# Altium PCB ELC102 - Score Board.PcbDoc (part 2 of 4)
Units mil, origin at the board's own origin, x right, y up, seen from the top; angles counter-clockwise.
Board outline 15000 x 7000 mil, 4 copper layers (Top Layer, Ground, Power, Bottom Layer); 609 components, 525 nets, 1780 pads, 561 vias.
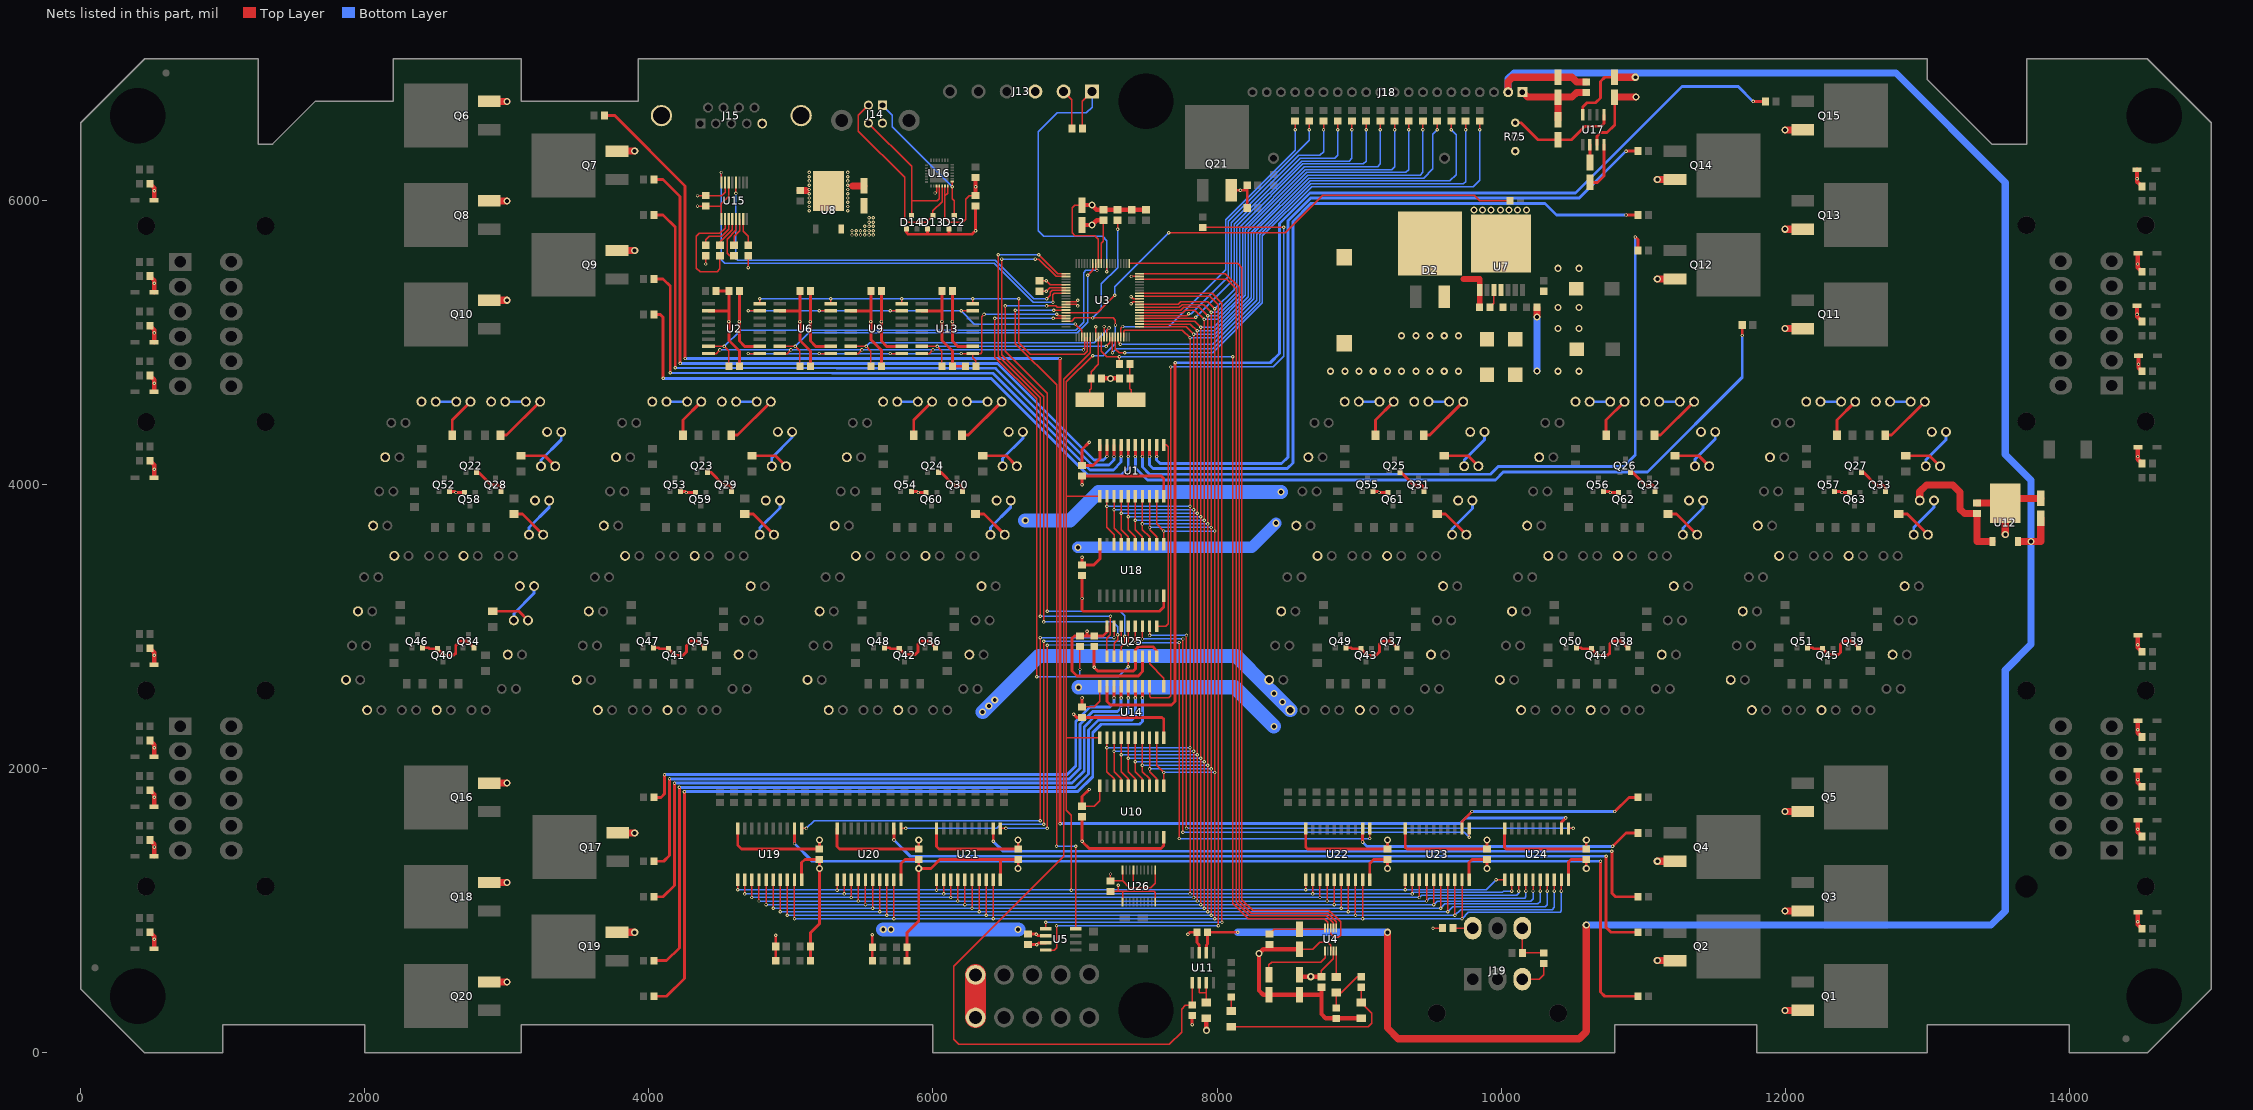
[diagram p4: the nets of this part, all layers, seen from the top]

## Via types
v1: diameter 24, hole 12, Top Layer to Bottom Layer, 468 vias
v2: diameter 50, hole 28, Top Layer to Bottom Layer, 93 vias

## Nets (pads, with @x,y where several pads share a name; then routed paths per layer and width w, separated by ;. In a path a pad name is that pad's centre, name@x,y a point inside that pad or via, vN(x,y) a via of type N, cw(c..) or ccw(c..) an arc to the next point about the centre after c; other vN are vias at no path point)
5V_DISABLE: R17.1 U3.35 | length 3522.8
  Top Layer w10: U3.35@6935.16,5211.42 7156.42,5211.42 v1(7280,5335) ; v1(7660,5775) 8480,5775 8745,6040 9810,6040 9850,6000 R17.1@10063,6000
  Bottom Layer w10: v1(7280,5335) 7280,5395 v1(7660,5775)
"+3.3 VDC": C1.1 C2.1 C3.1 C4.1 C6.1 C10.1 C14.1 C16.1 C18.1 C23.1 C25.1 C30.1 C33.1 C36.1 C37.1 C39.1 C46.1 C47.1 C48.1 C49.1 C50.1 C51.1 C52.1 C53.1 C54.1 J13.2 R1.1 R2.1 R3.2 R4.2 R16.2 R19.1 R31.2 R54.2 R55.1 R58.2 R60.2 R61.2 R68.2 R74.2 R82.2 R104.1 R231.1 R232.1 U1.20 U2.2 U3.12 U3.25 U3.32 U3.48 U3.71 U4.9 U5.3 U6.2 U8.3 U9.2 U10.20 U13.2 U14.20 U15.15 U16.6 U16.7 U18.20 U19.20 U20.20 U21.20 U22.20 U23.20 U24.20 U25.6 U25.16 U26.11 U26.17 U26.20 | length 14810
  Top Layer w10: v1(4342,6037) C36.1@4400,6037 4513,6037 4536.02,6060.02 U15.15@4536.02,6128.94 ; U16.6@6084.37,6104.45 6084.37,6035 ; U16.7@6104.06,6104.45 6104.06,6054.69 6084.37,6035 ; C39.1@6300,6037 6257,6037 6230,6010 6230,5870 6210,5850 6115,5850 6084.37,5880.63 6084.37,6035 ; C3.1@6750,5437 v1(6798,5437) 6826.73,5408.27 U3.25@6935.16,5408.27 ; J13.2@6920,6770 6978,6712 R3.2@6978,6510 ; U3.32@6935.16,5270.47 7009.53,5270.47 v1(7020,5260) ; C30.1@7050,1737 7137,1737 7175,1775 U10.20@7175,1881.1 ; C37.1@7050,2437 7137,2437 7175,2475 U14.20@7175,2581.1 ; C2.1@7050,5970 7000,5970 6980,5950 6980,5775 7000,5755 7140,5755 7165.47,5729.53 U3.12@7165.47,5559.84 ; U3.48@7145.79,5040.16 v1(7145.79,5114.21) ; v1(7250,1260) C54.1@7250,1212 7334.69,1212 ; U26.20@7334.84,1287.2 7334.84,1212.16 7334.69,1212 ; v1(7395,5325) 7410.16,5309.84 U3.71@7454.84,5309.84 ; U26.17@7411.61,1287.2 7411.61,1165 ; U26.11@7565.16,1287.2 7565.16,1195.16 7535,1165 7411.61,1165 ; C16.1@8735,537 8735,580 8819.68,664.68 U4.9@8819.68,719.29 ; v1(9521,879) R232.1@9588,879 ; 7334.69,1212 7381.69,1165 7411.61,1165
  Top Layer w20: U2.2@4419.88,5225 4563,5225 ; R2.1@4472,5365 C6.1@4563,5365 4563,5225 ; U19.20@4625,1581.1 4625,1465 4653,1437 C47.1@5200,1437 v2(5200,1500) ; R4.2@4637,4835 4637,4943 4563,5017 v1(4563,5150) 4563,5225 ; R60.2@4893,650 R61.2@4893,750 v1(4893,828) ; U6.2@4919.88,5225 5063,5225 ; C14.1@5063,5365 5063,5225 ; R16.2@5137,4835 5137,4943 5063,5017 v1(5063,5150) 5063,5225 ; U20.20@5325,1581.1 5325,1454 5342,1437 C48.1@5900,1437 v2(5900,1500) ; U9.2@5419.88,5225 5563,5225 ; C25.1@5563,5365 5563,5225 ; R68.2@5573,650 R74.2@5573,745 v1(5573,832) ; R31.2@5637,4835 5637,4948 5563,5022 v1(5563,5150) 5563,5225 ; U13.2@5919.88,5225 6063,5225 ; U21.20@6025,1581.1 6025,1455 6043,1437 C49.1@6600,1437 v2(6600,1500) ; C33.1@6063,5365 6063,5225 ; R1.1@6228,4835 R58.2@6137,4835 6137,4943 6063,5017 v1(6063,5150) 6063,5225 ; C10.1@6670,763 v1(6730,763) 6742,775 U5.3@6794.69,775 ; C30.1@7050,1737 7050,1805 v1(7100,1855) ; C37.1@7050,2437 v1(7050,2500) ; v1(7050,3490) C46.1@7050,3437 7132,3437 7175,3480 U18.20@7175,3581.1 ; v1(7085,2970) 7085,2937 ; v1(7100,4300) 7050,4250 C4.1@7050,4137 7127,4137 7175,4185 U1.20@7175,4281.1 ; U25.16@7225,3005.31 7225,2964 7198,2937 C53.1@7135,2937 7085,2937 ; U25.6@7475,2794.68 7475,2685 7445,2655 7015,2655 6980,2690 6980,2920 6997,2937 R231.1@7035,2937 7085,2937 ; v1(7825,200) R54.2@7825,263 ; U22.20@8625,1581.1 8625,1450 8638,1437 C50.1@9200,1437 v2(9200,1500) ; U23.20@9325,1581.1 9325,1449 9337,1437 C51.1@9900,1437 v2(9900,1500) ; U24.20@10025,1581.1 10025,1449 10037,1437 C52.1@10600,1437 v2(10600,1500)
  Top Layer w30: C39.1@6300,6037 v1(6300,6100) R82.2@6300,6163 ; C2.1@7050,5970 v2(7119,5970) 7152,5937 C1.1@7200,5937 R19.1@7300,5937 R55.1@7400,5937 R104.1@7500,5937 ; C18.1@8583,537 v2(8660,537) C16.1@8735,537
  other v1: 5430,5760 5460,5760 5490,5760 5520,5760 5550,5760 5580,5760 5430,5790 5460,5790 5490,5790 5520,5790 5550,5790 5580,5790 5520,5820 5550,5820 5580,5820 5550,5850 5580,5850 5550,5880 5580,5880
"+5 VDC": C29.1 C32.1 C42.1 C43.1 C45.1 J18.2 U11.6 U12.3 U17.8 | length 18073.4
  Top Layer w20: U11.6@7925,705.32 7925,760 7932,767 C29.1@7932,850 v1(8145,850) ; U17.8@10575,6605.31 10575,6660 10605,6690 10665,6690 10700,6725 10700,6840 10730,6870 C45.1@10800,6870
  Top Layer w50: v2(9200,850) 9200,175 9275,100 10550,100 10600,150 v2(10600,900) ; J18.2@10050,6765 10050,6840 10080,6870 C42.1@10400,6870 10500,6870 10533,6837 C43.1@10600,6837 ; C45.1@10800,6870 v2(10945,6870) ; U12.3@13645,3600.16 v2@13730,3600.16 ; v2(13730,3600) v2@13730,3600.16 ; 13799.84,3600.16 v2@13730,3600.16 ; 13800,3600.16 C32.1@13800,3765
  Bottom Layer w50: v1(8145,850) v2(9200,850) ; J18.2@10050,6765 10050,6860 10090,6900 10945,6900 ; v2(10600,900) 13450,900 13550,1000 13550,2695 13730,2875 v2(13730,3600) 13730,4035 13550,4215 13550,6130 12780,6900 10945,6900 ; v2(10945,6870) 10945,6900
"+8 VDC": C20.1 C24.1 C28.1 DS1.1 DS3.1 DS5.1 DS7.1 DS9.1 DS11.1 DS13.1 DS15.1 DS17.1 DS19.1 DS21.1 DS23.1 DS25.1 DS27.1 DS29.1 DS31.1 DS33.1 DS35.1 DS37.1 DS39.1 DS41.1 DS43.1 DS45.1 DS47.1 DS49.1 DS51.1 DS53.1 DS55.1 DS57.1 DS59.1 DS61.1 DS63.1 DS65.1 DS67.1 DS69.1 DS71.1 DS73.1 DS75.1 DS77.1 DS79.1 DS81.1 DS83.1 DS85.1 DS87.1 DS89.1 DS91.1 DS93.1 DS95.1 DS97.1 DS99.1 DS101.1 DS103.1 DS105.1 DS107.1 DS109.1 DS111.1 DS113.1 DS115.1 DS117.1 DS119.1 DS121.1 DS123.1 DS125.1 DS127.1 DS129.1 DS131.1 DS133.1 DS135.1 DS137.1 DS139.1 DS141.1 DS143.1 DS145.1 DS147.1 DS149.1 DS151.1 DS153.1 DS155.1 DS157.1 DS159.1 DS161.1 DS163.1 DS165.1 DS167.1 L1.2 R29.2 U12.1 | length 5754.3
  Top Layer w50: v2(10252,5182) R29.2@10252,5250 ; DS47.1@12947.9,3890.3 12947.9,3952.9 12995,4000 13180,4000 13230,3950 13230,3830 13262,3798 C28.1@13350,3798 13350,3605.16 ; 13350,3600.16 U12.1@13455,3600.16
  Bottom Layer w50: v2(10252,4802) v2(10252,5182)
  Bottom Layer w100: v2(6350,2400) v2(6392.96,2442.96) v2(6435,2485) 6745,2795 8135.3,2795 8335.1,2595.2 v2(8399.99,2530.31) 8460.15,2470.15 DS91.1@8516.1,2414.2 ; v2(6650,3750) 6965,3750 7165,3950 v2(8450,3950)
  other v2: 8460,2470 8800,4800 8900,4800 9000,4800 9100,4800 9200,4800 9300,4800 9400,4800 9500,4800 9600,4800 9700,4800
AUDIO_SHUTDOWN: R54.1 U3.46 U11.1 | length 7406.4
  Top Layer w10: U3.46@7106.42,5040.16 7106.42,4931.42 6920,4745 6920,1385 6145,610 6145,95 6180,60 7665,60 7750,145 7750,309 7778,337 R54.1@7825,337 U11.1@7825,494.68
CAN_H\S\/STBY: U3.34 U5.8 | length 4965.7
  Top Layer w10: v1(6580,5230) 6580,4995 6870,4705 v1(6870,1455) ; v1(6850,5230) 6851.1,5231.1 U3.34@6935.16,5231.1 ; v1(7005,1455) U5.8@7005.31,875
  Bottom Layer w10: v1(6580,5230) v1(6850,5230) ; v1(6870,1455) v1(7005,1455)
CANRX: U3.73 U5.1 | length 6254.2
  Top Layer w10: U5.1@6795,875.32 v1(6795,920) ; U3.73@7454.84,5349.21 7455.63,5350 7965,5350 8035,5280 v1(8035,920)
  Bottom Layer w10: v1(6795,920) v1(8035,920)
CANTX: U3.72 U5.4 | length 6331.3
  Top Layer w10: U5.4@6794.69,725 6855,725 6870,740 v1(6870,895) ; U3.72@7454.84,5329.53 7950.47,5329.53 8010,5270 v1(8010,895)
  Bottom Layer w10: v1(6870,895) v1(8010,895)
CLK0: U19.11 U25.15 | length 3592.6
  Top Layer w10: U19.11@5075,1581.1 v1(5108.9,1581.1) ; v1(6755,1635) v1(6755,2925) ; v1(7275,2925) U25.15@7275,3005.31
  Bottom Layer w10: v1(5108.9,1581.1) 5162.79,1635 v1(6755,1635) ; v1(6755,2925) v1(7275,2925)
CLK1: U20.11 U25.14 | length 2957.3
  Top Layer w10: U20.11@5775,1581.1 v1(5808.9,1581.1) ; v1(6780,1610) v1(6780,2900) ; v1(7325,2900) U25.14@7325,3005.31
  Bottom Layer w10: v1(5808.9,1581.1) 6448.9,1581.1 6477.79,1610 v1(6780,1610) ; v1(6780,2900) v1(7325,2900)
CLK2: U21.11 U25.13 | length 2319.2
  Top Layer w10: U21.11@6475,1581.1 v1(6513.9,1581.1) ; v1(6805,1581.1) v1(6805,2870) ; v1(7375,2875) U25.13@7375,3005.31
  Bottom Layer w10: v1(6513.9,1581.1) v1(6805,1581.1) ; v1(6805,2870) v1(7375,2875)
CLK3: U22.11 U25.12 | length 3216.4
  Top Layer w10: v1(7425,2890) U25.12@7425,3005.31 ; v1(7735,1510) v1(7735,2890) ; v1(9075,1510) U22.11@9075,1581.1
  Bottom Layer w10: v1(7425,2890) v1(7735,2890) ; v1(7735,1510) v1(9075,1510)
CLK4: U23.11 U25.11 | length 3825.9
  Top Layer w10: v1(7475,2915) U25.11@7475,3005.31 ; v1(7760,1555) v1(7760,2915) ; v1(9775,1520) U23.11@9775,1581.1
  Bottom Layer w10: v1(7475,2915) v1(7760,2915) ; v1(7760,1555) 9740,1555 v1(9775,1520)
CLK5: U24.11 U25.10 | length 4442
  Top Layer w10: v1(7525,2940) U25.10@7525,3005.31 ; v1(7785,1581.1) v1(7785,2940) ; U24.11@10475,1581.1 v1(10508.9,1581.1)
  Bottom Layer w10: v1(7525,2940) v1(7785,2940) ; v1(7785,1581.1) v1(10508.9,1581.1)
CLK6: U1.11 U25.9 | length 1370.3
  Top Layer w10: U25.9@7575,3005.31 7639.68,3005.31 7655,3020.63 7655,4270 7643.9,4281.1 U1.11@7625,4281.1
CLK7: U14.11 U25.7 | length 255
  Top Layer w10: U25.7@7525,2794.68 7525,2740 7625,2640 U14.11@7625,2581.1
COFS: U3.1 U4.3 | length 6235.4
  Top Layer w10: U3.1@7382.01,5559.84 8145.16,5559.84 8175,5530 8175,1080 8250.62,1004.38 8788.12,1004.38 8870,922.5 8870,830 8855,815 8825,815 8800,840 U4.3@8800,880.71
CSCK: U3.78 U4.2 | length 5807.4
  Top Layer w10: U3.78@7454.84,5447.64 8067.36,5447.64 8135,5380 8135,1060 8230,965 8770,965 8819.68,915.32 U4.2@8819.68,880.71
CSDO: U3.80 U4.1 | length 5849.4
  Top Layer w10: U3.80@7454.84,5487.01 8057.99,5487.01 8155,5390 8155,1070 8240.62,984.38 8780.62,984.38 8839.37,925.63 U4.1@8839.37,880.71
D0: R20.1 U1.2 U3.58 U10.18 U14.2 U18.18 U19.2 U20.2 U21.2 U22.2 U23.2 U24.2 | length 15150.8
  Top Layer w10: v1(4675,1120) U19.2@4675,1218.9 ; v1(5375,1120) U20.2@5375,1218.9 ; v1(6075,1120) U21.2@6075,1218.9 ; U14.2@7225,2218.9 v1(7225,2150) 7225,1980 7275,1930 U10.18@7275,1881.1 ; U1.2@7225,3918.9 v1(7225,3850) 7225,3700 7275,3650 U18.18@7275,3581.1 ; U3.58@7342.64,5040.16 7342.64,5082.64 7350,5090 7755,5090 v1(7810,5035) v1(7810,3850) v1(7810,2150) v1(7810,1120) ; v1(8675,1120) U22.2@8675,1218.9 ; v1(9375,1120) U23.2@9375,1218.9 ; v1(9550,6500) R20.1@9550,6563 ; v1(10075,1140) U24.2@10075,1218.9 U24.2@10075,1225
  Bottom Layer w10: v1(4675,1120) v1(5375,1120) v1(6075,1120) v1(7810,1120) v1(8675,1120) v1(9375,1120) 9385,1130 10010,1130 10020,1140 v1(10075,1140) ; v1(7225,2150) v1(7810,2150) ; v1(7225,3850) v1(7810,3850) ; v1(7810,5035) 7985,5035 8260,5310 8260,5774.38 8645.62,6160 9455,6160 9520,6225 9520,6470 v1(9550,6500)
D1: R21.1 U1.3 U3.61 U10.17 U14.3 U18.17 U19.3 U20.3 U21.3 U22.3 U23.3 U24.3 | length 15051.1
  Top Layer w10: v1(4725,1095) U19.3@4725,1218.9 ; v1(5425,1095) U20.3@5425,1218.9 ; v1(6125,1095) U21.3@6125,1218.9 ; U14.3@7275,2218.9 v1(7275,2125) 7275,1980 7325,1930 U10.17@7325,1881.1 ; U1.3@7275,3918.9 v1(7275,3825) 7275,3695 7325,3645 U18.17@7325,3581.1 ; U3.61@7454.84,5112.99 7782.01,5112.99 v1(7835,5060) v1(7835,3825) v1(7835,2125) v1(7835,1095) ; v1(8725,1095) U22.3@8725,1218.9 ; v1(9425,1095) U23.3@9425,1218.9 ; v1(9450,6500) R21.1@9450,6563 ; v1(10125,1140) U24.3@10125,1218.9
  Bottom Layer w10: v1(4725,1095) v1(5425,1095) v1(6125,1095) v1(7835,1095) v1(8725,1095) v1(9425,1095) 9440,1110 10110,1110 10125,1125 v1(10125,1140) ; v1(7275,2125) v1(7835,2125) ; v1(7275,3825) v1(7835,3825) ; v1(7835,5060) 7982.66,5060 8240,5317.34 8240,5779.92 8640.08,6180 9430,6180 9450,6200 v1(9450,6500)
D2: R22.1 U1.4 U3.62 U10.16 U14.4 U18.16 U19.4 U20.4 U21.4 U22.4 U23.4 U24.4 | length 15077.9
  Top Layer w10: v1(4775,1070) U19.4@4775,1218.9 ; v1(5475,1070) U20.4@5475,1218.9 ; v1(6175,1070) U21.4@6175,1218.9 ; U14.4@7325,2218.9 v1(7325,2100) 7325,1980 7375,1930 U10.16@7375,1881.1 ; U1.4@7325,3918.9 v1(7325,3800) 7325,3685 7375,3635 U18.16@7375,3581.1 ; U3.62@7454.84,5132.68 7812.32,5132.68 v1(7860,5085) v1(7860,3800) v1(7860,2100) v1(7860,1070) ; v1(8775,1070) U22.4@8775,1218.9 ; v1(9350,6500) R22.1@9350,6563 ; v1(9475,1070) U23.4@9475,1218.9 ; v1(10175,1140) U24.4@10175,1218.9
  Bottom Layer w10: v1(4775,1070) v1(5475,1070) v1(6175,1070) v1(7860,1070) v1(8775,1070) v1(9475,1070) 9495,1090 10165,1090 10175,1100 v1(10175,1140) ; v1(7325,2100) v1(7860,2100) ; v1(7325,3800) v1(7860,3800) ; v1(7860,5085) 7980,5085 8220,5325 8220,5789.38 8630.62,6200 9330,6200 9350,6220 v1(9350,6500)
D3: R23.1 U1.5 U3.63 U10.15 U14.5 U18.15 U19.5 U20.5 U21.5 U22.5 U23.5 U24.5 | length 15099
  Top Layer w10: v1(4825,1045) U19.5@4825,1218.9 ; v1(5525,1045) U20.5@5525,1218.9 ; v1(6225,1045) U21.5@6225,1218.9 U21.5@6225,1220 ; U14.5@7375,2218.9 v1(7375,2075) 7375,1980 7425,1930 U10.15@7425,1881.1 ; U1.5@7375,3918.9 v1(7375,3775) 7375,3685 7425,3635 U18.15@7425,3581.1 ; U3.63@7454.84,5152.36 7842.64,5152.36 v1(7885,5110) v1(7885,3775) v1(7885,2075) v1(7885,1045) ; v1(8825,1045) U22.5@8825,1218.9 ; v1(9250,6500) R23.1@9250,6563 ; v1(9525,1045) U23.5@9525,1218.9 ; v1(10225,1140) U24.5@10225,1218.9
  Bottom Layer w10: v1(4825,1045) v1(5525,1045) v1(6225,1045) v1(7885,1045) v1(8825,1045) v1(9525,1045) 9550,1070 10210,1070 10225,1085 v1(10225,1140) ; v1(7375,2075) v1(7885,2075) ; v1(7375,3775) v1(7885,3775) ; v1(7885,5110) 7976.56,5110 8200,5333.44 8200,5798 8622,6220 9230,6220 9250,6240 v1(9250,6500)
D4: R24.1 U1.6 U3.66 U10.14 U14.6 U18.14 U19.6 U20.6 U21.6 U22.6 U23.6 U24.6 | length 15152.8
  Top Layer w10: v1(4875,1020) U19.6@4875,1218.9 ; v1(5575,1020) U20.6@5575,1218.9 ; v1(6275,1020) U21.6@6275,1218.9 ; U14.6@7425,2218.9 v1(7425,2050) 7425,1980 7475,1930 U10.14@7475,1881.1 ; U1.6@7425,3918.9 v1(7425,3750) 7425,3685 7475,3635 U18.14@7475,3581.1 ; U3.66@7454.84,5211.42 7758.58,5211.42 7777.17,5230 7845,5230 v1(7910,5165) v1(7910,3750) v1(7910,2050) v1@7910,1025 ; v1(8875,1020) U22.6@8875,1218.9 ; v1(9150,6500) R24.1@9150,6563 ; v1(9575,1020) U23.6@9575,1218.9 ; v1(10275,1140) U24.6@10275,1218.9
  Bottom Layer w10: v1(4875,1020) v1(5575,1020) v1(6275,1020) v1(7910,1020) v1(8875,1020) v1(9575,1020) 9605,1050 10260,1050 10275,1065 v1(10275,1140) ; v1(7425,2050) v1(7910,2050) ; v1(7425,3750) v1(7910,3750) ; v1(7910,5165) 8005,5165 8180,5340 8180,5805 8615,6240 9130,6240 9150,6260 v1(9150,6500)
D5: R25.1 U1.7 U3.67 U10.13 U14.7 U18.13 U19.7 U20.7 U21.7 U22.7 U23.7 U24.7 | length 15180.8
  Top Layer w10: v1(4925,995) U19.7@4925,1218.9 ; v1(5625,995) U20.7@5625,1218.9 ; v1(6325,995) U21.7@6325,1218.9 ; U3.67@7454.84,5231.1 7746.1,5231.1 7765,5250 7875,5250 v1(7935,5190) v1(7935,3725) v1(7935,2025) v1(7935,995) ; U14.7@7475,2218.9 v1(7475,2025) 7475,1980 7525,1930 U10.13@7525,1881.1 ; U1.7@7475,3918.9 v1(7475,3725) 7475,3685 7525,3635 U18.13@7525,3581.1 ; v1(8925,995) U22.7@8925,1218.9 ; v1(9050,6500) R25.1@9050,6563 ; v1(9625,995) U23.7@9625,1218.9 ; v1(10325,1140) U24.7@10325,1218.9
  Bottom Layer w10: v1(4925,995) v1(5625,995) v1(6325,995) v1(7935,995) v1(8925,995) v1(9625,995) 9660,1030 10310,1030 10325,1045 v1(10325,1140) ; v1(7475,2025) v1(7935,2025) ; v1(7475,3725) v1(7935,3725) ; v1(7935,5190) 8000,5190 8160,5350 8160,5815 8605,6260 9030,6260 9050,6280 v1(9050,6500)
D6: R26.1 U1.8 U3.68 U10.12 U14.8 U18.12 U19.8 U20.8 U21.8 U22.8 U23.8 U24.8 | length 15205.7
  Top Layer w10: v1(4975,970) U19.8@4975,1218.9 ; v1(5675,970) U20.8@5675,1218.9 ; v1(6375,970) U21.8@6375,1218.9 ; U3.68@7454.84,5250.79 7735.79,5250.79 7755,5270 7905,5270 v1(7960,5215) v1(7960,3700) v1(7960,2000) v1(7960,970) ; U14.8@7525,2218.9 v1(7525,2000) 7525,1980 7575,1930 U10.12@7575,1881.1 ; U1.8@7525,3918.9 v1(7525,3700) 7525,3685 7575,3635 U18.12@7575,3581.1 ; v1(8950,6500) R26.1@8950,6563 ; v1(8975,970) U22.8@8975,1218.9 ; v1(9675,970) U23.8@9675,1218.9 ; v1(10375,1140) U24.8@10375,1218.9
  Bottom Layer w10: v1(4975,970) v1(5675,970) v1(6375,970) v1(7960,970) v1(8975,970) v1(9675,970) 9715,1010 10360,1010 10375,1025 v1(10375,1140) ; v1(7525,2000) v1(7960,2000) ; v1(7525,3700) v1(7960,3700) ; v1(7960,5215) 7998.12,5215 8140,5356.88 8140,5824.92 8595.08,6280 8930,6280 8950,6300 v1(8950,6500)
D7: R27.1 U1.9 U3.69 U10.11 U14.9 U18.11 U19.9 U20.9 U21.9 U22.9 U23.9 U24.9 | length 15126.9
  Top Layer w10: v1(5025,945) U19.9@5025,1218.9 ; v1(5725,945) U20.9@5725,1218.9 ; v1(6425,945) U21.9@6425,1218.9 ; U3.69@7454.84,5270.47 7725.47,5270.47 7745,5290 7935,5290 v1(7985,5240) v1(7985,3675) v1(7985,1975) v1(7985,945) ; U14.9@7575,2218.9 7575,2025 v1(7625,1975) U10.11@7625,1881.1 ; U1.9@7575,3918.9 7575,3725 v1(7625,3675) U18.11@7625,3581.1 ; v1(8850,6500) R27.1@8850,6563 ; v1(9025,945) U22.9@9025,1218.9 ; v1(9725,945) U23.9@9725,1218.9 ; v1(10425,1140) U24.9@10425,1218.9
  Bottom Layer w10: v1(5025,945) v1(5725,945) v1(6425,945) v1(7985,945) v1(9025,945) v1(9725,945) 9770,990 10415,990 10425,1000 v1(10425,1140) ; v1(7625,1975) v1(7985,1975) ; v1(7625,3675) v1(7985,3675) ; v1(7985,5240) 8120,5375 8120,5835 8585,6300 8830,6300 8850,6320 v1(8850,6500)
F\O\R\C\E\O\F\F\: U3.28 U15.16 | length 3293.3
  Top Layer w10: U15.16@4510.43,6128.94 v1(4510.43,6199.57) ; v1(6845,5285) 6845,5340 6854.21,5349.21 U3.28@6935.16,5349.21
  Bottom Layer w10: v1(4510.43,6199.57) 4510.43,5584.57 4535,5560 6432.81,5560 6707.81,5285 v1(6845,5285)
FORCEON: U3.27 U15.12 | length 3012.1
  Top Layer w10: v1(4612.79,6052.21) U15.12@4612.79,6128.94 ; v1(6800,5310) 6825,5335 6825,5355 6838.9,5368.9 U3.27@6935.16,5368.9
  Bottom Layer w10: v1(4612.79,6052.21) 4612.79,5592.21 4625,5580 6440,5580 6710,5310 v1(6800,5310)
GND: C1.2 C2.2 C3.2 C4.2 C5.2 C6.2 C7.2 C8.2 C9.2 C10.2 C11.2 C12.2 C14.2 C16.2 C17.2 C18.2 C19.2 C20.2 C22.2 C23.2 C24.2 C25.2 C26.2 C27.2 C28.2 C29.2 C30.2 C31.2 C32.2 C33.2 C36.2 C37.2 C38.2 C39.2 C40.2 C41.1 C42.2 C43.2 C45.2 C46.2 C47.2 C48.2 C49.2 C50.2 C51.2 C52.2 C53.2 C54.2 D2.3 D3.1 D4.1 D5.1 D6.1 D7.1 D8.1 D9.1 D10.1 D11.1 D12.1 D13.1 D14.1 D15.1 D16.1 D17.1 D18.1 D19.1 D20.1 D21.1 D22.1 D23.1 D24.1 D25.1 J1.1 J5.1 J13.3 J14.4 J15.5 J15.10 J15.11 J18.1 J19.3 JP1.2 JP2.2 JP3.2 JP4.2 Q1.3 Q2.3 Q3.3 Q4.3 Q5.3 Q6.3 Q7.3 Q8.3 Q9.3 Q10.3 Q11.3 Q12.3 Q13.3 Q14.3 Q15.3 Q16.3 Q17.3 Q18.3 Q19.3 Q20.3 Q21.3 Q22.2 Q23.2 Q24.2 Q25.2 Q26.2 Q27.2 Q28.2 Q29.2 Q30.2 Q31.2 Q32.2 Q33.2 Q34.2 Q35.2 Q36.2 Q37.2 Q38.2 Q39.2 Q40.2 Q41.2 Q42.2 Q43.2 Q44.2 Q45.2 Q46.2 Q47.2 Q48.2 Q49.2 Q50.2 Q51.2 Q52.2 Q53.2 Q54.2 Q55.2 Q56.2 Q57.2 Q58.2 Q59.2 Q60.2 Q61.2 Q62.2 Q63.2 R18.1 R28.1 R34.2 R36.2 R38.2 R40.2 R42.2 R44.2 R46.2 R48.2 R50.2 R52.2 R57.1 R75.1 R85.2 R87.2 R89.2 R91.2 R93.2 R95.2 R97.2 R99.2 R101.2 R103.2 R234.1 U1.10 U2.10 U3.11 U3.26 U3.31 U3.51 U3.70 U3.79 U4.8 U5.2 U6.10 U7.4 U7.8 U8.2 U9.10 U10.10 U11.7 U12.2 U13.10 U14.10 U15.1 U15.14 U16.3 U17.3 U18.10 U19.10 U20.10 U21.10 U22.10 U23.10 U24.10 U25.5 U25.8 U26.1 U26.10 | length 31836.3
  Top Layer w10: v1(4342,5963) C36.2@4400,5963 4507.43,5963 ; v1(4400,5555) C38.2@4400,5613 ; U15.1@4510.43,5871.06 4510.43,5980.43 4561.61,6031.61 U15.14@4561.61,6128.94 ; v1(4700,5530) C40.2@4700,5613 ; v1(6015,6055) 6025.31,6065.31 U16.3@6025.31,6104.45 ; C3.2@6750,5363 v1(6798,5363) 6823.58,5388.58 U3.26@6935.16,5388.58 ; U3.31@6935.16,5290.16 7010.16,5290.16 v1(7020,5300) ; U3.11@7185.16,5559.84 7185.16,5700.16 7200,5715 C1.2@7200,5863 ; U3.51@7204.84,5040.16 v1(7204.84,5114.84) ; C54.2@7250,1138 7305,1138 ; v1(7305,1180) 7305,1138 ; U26.1@7334.84,1062.8 7334.84,1137.84 ; v1(7395,5275) 7410.16,5290.16 U3.70@7454.84,5290.16 ; v1(7397.32,5467.32) U3.79@7454.84,5467.32 ; U26.10@7565.16,1062.8 7565.16,1129.84 7557,1138 7305,1138 ; C7.2@8580,730 8675,730 8725,780 8780,780 8800,760 U4.8@8800,719.29 ; J19.3@10145,520 J19.3@10150,520 10270,520 10300,550 R234.1@10300,631
  Top Layer w20: Q46.2@2407.4,2853.74 2448.74,2853.74 2456.22,2846.26 Q40.2@2512.6,2846.26 v1(2558.86,2800) 2625,2800 2640,2815 2640,2870 2670,2900 2721.14,2900 Q34.2@2767.4,2853.74 ; Q52.2@2597.4,3953.74 2633.74,3953.74 v1(2641.22,3946.26) Q58.2@2702.6,3946.26 ; Q22.2@2787.4,4088.74 2801.26,4088.74 v1(2890,4000) 2940,4000 2957.4,3982.6 Q28.2@2957.4,3953.74 ; Q47.2@4032.4,2853.74 4068.74,2853.74 4076.22,2846.26 Q41.2@4137.6,2846.26 v1(4183.86,2800) 4240,2800 4265,2825 4265,2870 4295,2900 4346.14,2900 Q35.2@4392.4,2853.74 ; Q53.2@4222.4,3953.74 4256.26,3953.74 v1(4263.74,3946.26) Q59.2@4327.6,3946.26 ; Q23.2@4412.4,4088.74 4436.26,4088.74 v1(4525,4000) 4565,4000 4582.4,3982.6 Q29.2@4582.4,3953.74 ; C6.2@4637,5365 v1(4637,5150) 4637,5013 4675,4975 U2.10@4780.12,4975 ; U19.10@5075,1218.9 5075,1340 5098,1363 C47.2@5200,1363 v2(5200,1300) 5200,910 5137,847 JP2.2@5137,750 JP1.2@5137,650 ; C14.2@5137,5365 v1(5137,5150) 5137,5013 5175,4975 U6.10@5280.12,4975 ; C25.2@5637,5365 v1(5637,5150) 5637,5013 5675,4975 U9.10@5780.12,4975 ; Q48.2@5657.4,2853.74 5693.74,2853.74 5701.22,2846.26 Q42.2@5762.6,2846.26 v1(5803.86,2805) 5875,2805 5895,2825 5895,2880 5915,2900 5971.14,2900 Q36.2@6017.4,2853.74 ; U20.10@5775,1218.9 5775,1335 5803,1363 C48.2@5900,1363 v2(5900,1300) ; D14.1@5812.6,5803.74 5812.6,5777.6 5825.2,5765 6275,5765 v1(6300,5790) C39.2@6300,5963 ; JP3.2@5817,650 JP4.2@5817,745 5817,847 5900,930 v2(5900,1300) ; Q54.2@5847.4,3953.74 5888.74,3953.74 v1(5896.22,3946.26) Q60.2@5952.6,3946.26 ; 5962.6,5767.6 D13.1@5962.6,5803.74 ; Q24.2@6037.4,4088.74 6056.26,4088.74 v1(6145,4000) 6190,4000 6207.4,3982.6 Q30.2@6207.4,3953.74 ; 6112.6,5767.6 D12.1@6112.6,5803.74 ; C33.2@6137,5365 v1(6137,5150) 6137,5013 6175,4975 U13.10@6280.12,4975 ; U21.10@6475,1218.9 6475,1363 ; v2(6600,1300) C49.2@6600,1363 6475,1363 ; C10.2@6670,837 v1(6728,837) 6740,825 U5.2@6794.69,825 ; v1(6990,2385) 7012,2363 C37.2@7050,2363 7613,2363 7625,2351 U14.10@7625,2218.9 ; C30.2@7050,1663 v1(7050,1490) 7100,1440 7605,1440 7625,1460 U10.10@7625,1518.9 ; C46.2@7050,3363 v1(7050,3200) 7050,3120 7060,3110 7595,3110 7625,3140 U18.10@7625,3218.9 ; v1(7050,4000) C4.2@7050,4063 7607,4063 7625,4045 U1.10@7625,3918.9 ; C53.2@7135,2863 v1(7135,2715) 7160,2690 7410,2690 7425,2705 U25.5@7425,2794.68 7425,2840 7445,2860 7550,2860 7575,2835 U25.8@7575,2794.68 ; v1(7795,835) 7810,850 C29.2@7858,850 7858,777 7875,760 U11.7@7875,705.32 ; Q21.3@8100,6075 v1(8165,6075) 8213,6075 ; C31.2@8213,5950 8213,6075 ; R57.1@8213,6110 8213,6075 ; Q49.2@8907.4,2853.74 8943.74,2853.74 8951.22,2846.26 Q43.2@9012.6,2846.26 v1(9058.86,2800) 9120,2800 9145,2825 9145,2880 9165,2900 9221.14,2900 Q37.2@9267.4,2853.74 ; U22.10@9075,1218.9 9075,1335 9103,1363 C50.2@9200,1363 v2(9200,1300) ; Q55.2@9097.4,3953.74 9133.74,3953.74 v1(9141.22,3946.26) Q61.2@9202.6,3946.26 ; Q25.2@9287.4,4088.74 9296.26,4088.74 v1(9385,4000) 9440,4000 9457.4,3982.6 Q31.2@9457.4,3953.74 ; U23.10@9775,1218.9 9775,1341 9797,1363 C51.2@9900,1363 v2(9900,1300) ; U24.10@10475,1218.9 10475,1345 10493,1363 C52.2@10600,1363 v2(10600,1300) ; Q50.2@10532.4,2853.74 10563.74,2853.74 10571.22,2846.26 Q44.2@10637.6,2846.26 v1(10683.86,2800) 10750,2800 10765,2815 10765,2880 10785,2900 10846.14,2900 Q38.2@10892.4,2853.74 ; U17.3@10675,6394.69 10675,6455 10700,6480 10745,6480 10800,6535 C45.2@10800,6730 ; Q56.2@10722.4,3953.74 10761.26,3953.74 v1(10768.74,3946.26) Q62.2@10827.6,3946.26 ; Q26.2@10912.4,4088.74 10926.26,4088.74 v1(11015,4000) 11065,4000 11082.4,3982.6 Q32.2@11082.4,3953.74 ; Q51.2@12157.4,2853.74 12193.74,2853.74 12201.22,2846.26 Q45.2@12262.6,2846.26 v1(12303.86,2805) 12375,2805 12390,2820 12390,2880 12410,2900 12471.14,2900 Q39.2@12517.4,2853.74 ; Q57.2@12347.4,3953.74 12386.26,3953.74 12393.74,3946.26 v1(12400,3946.26) Q63.2@12452.6,3946.26 ; Q27.2@12537.4,4088.74 12551.26,4088.74 v1(12640,4000) 12690,4000 12707.4,3982.6 Q33.2@12707.4,3953.74 ; v2(5900,1300) 5985,1300 6048,1363 6475,1363
  Top Layer w30: R103.2@487,850 516.93,820.07 v1(516.93,800) D24.1@516.93,735 ; R101.2@487,1500 516.93,1470.07 v1(516.93,1450) D23.1@516.93,1385 ; R99.2@487,1850 516.93,1820.07 v1(516.93,1800) D22.1@516.93,1735 ; R97.2@487,2200 516.93,2170.07 v1(516.93,2150) D21.1@516.93,2085 ; R95.2@487,2850 516.93,2820.07 v1(516.93,2800) D20.1@516.93,2735 ; R52.2@487,4170 516.93,4140.07 v1(516.93,4110) D7.1@516.93,4050 ; R50.2@487,4770 516.93,4740.07 v1(516.93,4715) D6.1@516.93,4655 ; R48.2@487,5120 516.93,5090.07 v1(516.93,5070) D11.1@516.93,5005 ; R46.2@487,5470 516.93,5440.07 v1(516.93,5420) D10.1@516.93,5355 ; R44.2@487,6120 516.93,6090.07 v1(516.93,6070) D9.1@516.93,6005 ; C2.2@7050,5830 v2(7120,5830) 7153,5863 C1.2@7200,5863 ; C26.2@7187,4750 v2(7250,4750) C22.2@7313,4750 ; v2(7925,160) C27.2@7925,245 ; C7.2@8580,730 8370,730 8325,730 v2(8295,700) 8295,440 8325,410 C12.2@8365,410 C18.2@8580,410 8730,410 ; C16.2@8735,463 8735,275 8765,245 8840,245 C19.2@9015,245 ; D17.1@14478.07,5260 v1(14478.07,5200) 14478.07,5184.93 R89.2@14513,5150 ; D19.1@14478.07,6220 v1(14478.07,6155) 14478.07,6134.93 R93.2@14513,6100 ; D3.1@14483.07,990 v1(14483.07,925) 14483.07,904.93 R34.2@14513,875 ; D4.1@14483.07,1640 v1(14483.07,1575) 14483.07,1554.93 R36.2@14513,1525 ; D5.1@14483.07,1990 v1(14483.07,1925) 14483.07,1904.93 R38.2@14513,1875 ; D25.1@14483.07,2340 v1(14483.07,2275) 14483.07,2254.93 R40.2@14513,2225 ; D8.1@14483.07,2940 v1(14483.07,2875) 14483.07,2854.93 R42.2@14513,2825 ; D15.1@14483.07,4265 v1(14483.07,4200) 14483.07,4179.93 R85.2@14513,4150 ; D18.1@14483.07,5630 v1(14483.07,5555) 14483.07,5529.93 R91.2@14513,5500 ; D16.1@14488.07,4910 v1(14488.07,4850) 14488.07,4824.93 R87.2@14513,4800
  Top Layer w50: Q20.3@2875,500 v2(3000,500) ; Q18.3@2875,1200 v2(3000,1200) ; Q16.3@2875,1900 v2(3000,1900) ; Q10.3@2875,5300 v2(3000,5300) ; Q8.3@2875,6000 v2(3000,6000) ; Q6.3@2875,6700 v2(3000,6700) ; Q19.3@3775,850 v2@3895,850 ; Q9.3@3775,5650 v2(3900,5650) ; Q7.3@3775,6350 v2(3900,6350) ; Q17.3@3780,1550 v2(3900,1550) ; C17.2@5065,6072 5107,6072 ; 5435,6105 C23.2@5515,6105 ; J18.1@10150,6765 10185,6730 C42.2@10400,6730 ; C41.1@10400,6570 C42.2@10400,6730 ; C43.2@10600,6763 10533,6763 10500,6730 C42.2@10400,6730 ; C45.2@10800,6730 v2(10950,6730) ; v2(11100,650) Q2.3@11225,650 ; v2(11100,1350) Q4.3@11225,1350 ; v2(11100,5450) Q12.3@11225,5450 ; v2(11100,6150) Q14.3@11225,6150 ; v2(12000,300) Q1.3@12125,300 ; v2(12000,1000) Q3.3@12125,1000 ; v2(12000,1700) Q5.3@12125,1700 ; v2(12000,5100) Q11.3@12125,5100 ; v2(12000,5800) Q13.3@12125,5800 ; v2(12000,6500) Q15.3@12125,6500 ; C28.2@13350,3872 U12.2@13483,3872 ; v2(13550,3650) U12.2@13550,3869.84 ; U12.2@13610,3905 C32.2@13800,3905
  Top Layer w150: J1.1@6300,250 J5.1@6300,550
  Bottom Layer w80: v2(7020,3560) 8245,3560 v2(8415,3730)
  Bottom Layer w100: v2(5650,870) v2(5705,870) v2(6600,870) ; v2(7025,2575) 8125,2575 v2(8400,2300)
  other v1: 5130,5930 5400,5930 5130,5960 5400,5960 5130,5990 5400,5990 5130,6020 5400,6020 5130,6050 5400,6050 5130,6080 5400,6080 5130,6110 5400,6110 5130,6140 5400,6140 5130,6170 5400,6170 5130,6200 5400,6200
  other v2: 3900,850 10400,4800 10550,4800 9300,5050 9400,5050 9500,5050 9600,5050 9700,5050 10400,5100 10550,5100 10400,5250 10550,5250 10400,5525 10550,5525 9810,5935 9870,5935 9930,5935 9995,5935 10055,5935 10115,5935 10180,5935
LAMP0: R6.1 U19.12 | length 7028.3
  Top Layer w20: v1(5025,1475) U19.12@5025,1581.1 ; v1(10700,1350) 10700,430 10730,400 R6.1@10963,400
  Bottom Layer w20: v1(5025,1475) 5150,1350 v1(10700,1350)
LAMP1: R7.1 U20.12 | length 5881.2
  Top Layer w20: v1(5725,1500) U20.12@5725,1581.1 ; v1(10740,1385) 10740,885 10775,850 R7.1@10963,850
  Bottom Layer w20: v1(5725,1500) 5840,1385 v1(10740,1385)
LAMP2: R8.1 U21.12 | length 4963.5
  Top Layer w20: v1(6425,1490) U21.12@6425,1581.1 ; v1(10780,1420) 10780,1125 10805,1100 R8.1@10963,1100
  Bottom Layer w20: v1(6425,1490) 6495,1420 v1(10780,1420)
LAMP3: R9.1 U22.12 | length 2085.9
  Top Layer w20: v1(9025,1485) U22.12@9025,1581.1 ; v1(10785,1455) 10880,1550 R9.1@10963,1550
  Bottom Layer w20: v1(9025,1485) 9055,1455 v1(10785,1455)
LAMP4: R10.1 U23.12 | length 1357.3
  Top Layer w20: U23.12@9725,1581.1 9725,1630 v1(9795,1700) ; v1(10800,1700) 10900,1800 R10.1@10963,1800
  Bottom Layer w20: v1(9795,1700) v1(10800,1700)
LAMP5: R11.1 U24.12 | length 11565.9
  Top Layer w20: R11.1@3687,6600 3760,6600 4255,6105 v1(4255,4890) ; v1(6895,1615) v1(6895,4890) ; U24.12@10425,1581.1 10425,1625 v1(10455,1655)
  Bottom Layer w20: v1(4255,4890) v1(6895,4890) ; v1(6895,1615) 9710,1615 9750,1655 v1(10455,1655)
LAMP6: R12.1 U1.19 | length 4785.8
  Top Layer w20: R12.1@4037,6150 4100,6150 4220,6030 v1(4220,4855) ; v1(7225,4200) U1.19@7225,4281.1
  Bottom Layer w20: v1(4220,4855) 6455,4855 7135,4175 7200,4175 v1(7225,4200)
LAMP7: R13.1 U1.18 | length 4665.5
  Top Layer w20: R13.1@4037,5900 4100,5900 4185,5815 v1(4185,4825) ; v1(7275,4200) U1.18@7275,4281.1
  Bottom Layer w20: v1@4190,4825 6445,4820 ; 6440,4820 7120,4140 7240,4140 7275,4175 v1(7275,4200)
LAMP8: R14.1 U1.17 | length 4344.3
  Top Layer w20: R14.1@4037,5450 4100,5450 4150,5400 v1(4150,4790) ; v1(7325,4200) U1.17@7325,4281.1
  Bottom Layer w20: v1(4150,4790) 6425,4785 7105,4105 7270,4105 7325,4160 v1(7325,4200)
LAMP9: R15.1 U1.16 | length 4239.8
  Top Layer w20: R15.1@4037,5200 4080,5200 4100,5180 v1(4100,4750) ; v1(7375,4200) U1.16@7375,4281.1
  Bottom Layer w20: v1(4100,4750) 6410,4750 7090,4070 7325,4070 7375,4120 v1(7375,4200)
LAMP10: R62.1 U1.15 | length 5135.8
  Top Layer w20: v1(7425,4200) U1.15@7425,4281.1 ; v1(11698,5052) R62.1@11698,5125
  Bottom Layer w20: v1(7425,4200) 7425,4120 7510,4035 9960,4035 10015,4090 11030,4090 11698,4758 v1(11698,5052)
LAMP11: R63.1 U1.14 | length 5340.2
  Top Layer w20: v1(7475,4200) U1.14@7475,4281.1 ; v1(10945,5745) 10963,5727 R63.1@10963,5650
  Bottom Layer w20: v1(7475,4200) 7475,4125 7525,4075 9925,4075 9980,4130 10865,4130 10945,4210 v1(10945,5745)
LAMP12: R64.1 U1.13 | length 5390.9
  Top Layer w20: v1(7525,4200) U1.13@7525,4281.1 ; v1(10880,5900) R64.1@10963,5900
  Bottom Layer w20: v1(7525,4200) 7525,4140 7550,4115 8495,4115 8535,4155 8535,5855 8660,5980 10310,5980 10390,5900 v1(10880,5900)
LAMP13: R65.1 U1.12 | length 5391.1
  Top Layer w20: v1(7575,4200) U1.12@7575,4281.1 ; v1(10880,6350) R65.1@10963,6350
  Bottom Layer w20: v1(7575,4200) 7575,4175 7600,4150 8455,4150 8500,4195 8500,5860 8660,6020 10550,6020 v1(10880,6350)
LAMP14: R66.1 U14.19 | length 8534.9
  Top Layer w20: U14.19@7225,2581.1 7225,2475 7250,2450 7680,2450 7705,2475 v1(7705,4860) ; v1(11775,6700) R66.1@11863,6700
  Bottom Layer w20: v1(7705,4860) 8375,4860 8440,4925 8440,5840 8655,6055 10525,6055 11275,6805 11670,6805 v1(11775,6700)
LAMP15: R69.1 U14.18 | length 3893.2
  Top Layer w20: R69.1@4037,1800 4085,1800 4110,1825 v1(4110,1960) ; v1(7275,2500) U14.18@7275,2581.1
  Bottom Layer w20: v1(4110,1960) 6945,1960 7005,2020 7005,2335 7105,2435 7245,2435 7275,2465 v1(7275,2500)
LAMP16: R70.1 U14.17 | length 4384.4
  Top Layer w20: R70.1@4037,1350 4105,1350 4145,1390 v1(4145,1930) ; v1(7325,2500) U14.17@7325,2581.1
  Bottom Layer w20: v1(4145,1930) 6960,1930 7035,2005 7035,2315 7125,2405 7300,2405 7325,2430 v1(7325,2500)
LAMP17: R71.1 U14.16 | length 4663.9
  Top Layer w20: R71.1@4037,1100 4100,1100 4180,1180 v1(4180,1900) ; v1(7375,2500) U14.16@7375,2581.1
  Bottom Layer w20: v1(4180,1900) 6980,1900 7065,1985 7065,2295 7145,2375 7355,2375 7375,2395 v1(7375,2500)
LAMP18: R72.1 U14.15 | length 5155.1
  Top Layer w20: R72.1@4037,650 4125,650 4215,740 v1(4215,1870) ; v1(7425,2500) U14.15@7425,2581.1
  Bottom Layer w20: v1(4215,1870) 7000,1870 7095,1965 7095,2275 7165,2345 7400,2345 7425,2370 v1(7425,2500)
LAMP19: R73.1 U14.14 | length 5437.5
  Top Layer w20: R73.1@4037,400 4125,400 4250,525 v1(4250,1840) ; v1(7475,2500) U14.14@7475,2581.1
  Bottom Layer w20: v1(4250,1840) 7020,1840 7125,1945 7125,2255 7185,2315 7455,2315 7475,2335 v1(7475,2500)
LAMP20: R83.1 U14.13 | length 4850.5
  Top Layer w10: U14.13@7525,2581.1 7525,2510 7535,2500 7660,2500 7675,2515 v1(7675,4830) ; R83.1@7900,5813 v1(8470,5813)
  Bottom Layer w10: v1(7675,4830) 8395,4830 8470,4905 v1(8470,5813)
LCD_CS1: R79.1 U3.64 | length 2238.5
  Top Layer w10: U3.64@7454.84,5172.05 v1@7850,5172.05 ; v1(8750,6500) R79.1@8750,6563
  Bottom Layer w10: v1(7850,5180) 8100,5430 8100,5844.38 8575.62,6320 8725,6320 8750,6345 v1(8750,6500)
LCD_CS2: R80.1 U3.65 | length 2072.5
  Top Layer w10: U3.65@7454.84,5191.73 7786.73,5191.73 v1(7800,5205) ; v1(8650,6500) R80.1@8650,6563
  Bottom Layer w10: v1(7800,5205) 7820,5205 8080,5465 8080,5855 8650,6425 v1(8650,6500)
LCD_D/I: R76.1 U3.55 | length 3859.5
  Top Layer w10: U3.55@7283.58,5040.16 7283.58,4956.42 7310,4930 v1(7350,4930) ; v1(9850,6500) R76.1@9850,6563
  Bottom Layer w10: v1(7350,4930) 7969.38,4930 8320,5280.62 8320,5753.75 8666.25,6100 9805,6100 9850,6145 v1(9850,6500)
LCD_E: R78.1 U3.56 | length 3582
  Top Layer w10: U3.56@7303.27,5040.16 7303.27,5006.73 v1(7320,4990) ; v1(9650,6500) R78.1@9650,6563
  Bottom Layer w10: v1(7320,4990) 7321.73,4991.73 7971.73,4991.73 8280,5300 8280,5765 8655,6140 9640,6140 9685,6185 9685,6465 v1(9650,6500)
LCD_R/W: R77.1 U3.54 | length 3798.3
  Top Layer w10: v1(7263.9,4930) U3.54@7263.9,5040.16 ; v1(9750,6500) R77.1@9750,6563
  Bottom Layer w10: v1(7263.9,4930) 7293.9,4960 7970,4960 8300,5290 8300,5759.38 8660.62,6120 9735,6120 9750,6135 v1(9750,6500)
LCD_RESET: R81.1 U3.57 | length 2221.5
  Top Layer w10: U3.57@7322.95,5040.16 7322.95,5102.95 v1(7335,5115) ; v1(8550,6500) R81.1@8550,6563
  Bottom Layer w10: v1(7335,5115) 7660,5115 8060,5515 8060,5865 8550,6355 v1(8550,6500)
LED_CLK_A: U3.21 U25.1 | length 3983.1
  Top Layer w10: v1(6460,5620) 6460,4910 6755,4615 v1(6755,3075) ; v1(6745,5620) 6877.99,5487.01 U3.21@6935.16,5487.01 ; U25.1@7225,2794.68 7225,2920 7250,2945 v1(7250,3075)
  Bottom Layer w10: v1(6460,5620) v1(6745,5620) ; v1(6755,3075) v1(7250,3075)
LED_CLK_B: U3.22 U25.2 | length 3928.3
  Top Layer w10: v1(6485,5590) 6485,4915 6780,4620 v1(6780,3035) ; v1(6720,5590) 6745,5590 6867.68,5467.32 U3.22@6935.16,5467.32 ; U25.2@7275,2794.68 7275,2885 7300,2910 v1(7300,2945)
  Bottom Layer w10: v1(6485,5590) v1(6720,5590) ; v1(6780,3035) 7265,3035 7300,3000 v1(7300,2945)
LED_CLK_C: U3.33 U25.3 | length 3554.3
  Top Layer w10: v1(6510,5260) 6510,4940 6805,4645 v1(6805,3110) ; v1(6800,5260) 6865,5260 6874.21,5250.79 U3.33@6935.16,5250.79 ; U25.3@7325,2794.68 7325,2860 7350,2885 v1(7350,2935)
  Bottom Layer w10: v1(6510,5260) v1(6800,5260) ; v1(6805,3110) 7320,3110 7350,3080 v1(7350,2935)
LED_CLK_EN: R231.2 U3.37 U25.4 | length 4106.1
  Top Layer w10: v1(6435,5172.05) 6435,4900 6730,4605 v1(6730,2650) ; v1(6847.95,5172.05) U3.37@6935.16,5172.05 ; v1(7035,2700) R231.2@7035,2863 ; v1(7375,2720) U25.4@7375,2794.68
  Bottom Layer w10: v1(6435,5172.05) v1(6847.95,5172.05) ; v1(6730,2650) 7035,2650 ; v1(7035,2700) 7035,2650 ; v1(7375,2720) 7305,2650 7035,2650
LED_OE: R19.2 U1.1 U3.38 U14.1 U19.1 U20.1 U21.1 U22.1 U23.1 U24.1 | length 11594.6
  Top Layer w10: v1(4625,1150) U19.1@4625,1218.9 ; v1(5325,1145) U20.1@5325,1218.9 ; v1(6025,1145) U21.1@6025,1218.9 ; U3.38@6935.16,5152.36 6977.36,5152.36 7000,5175 v1(7125,5175) 7270,5175 7285,5160 v1(7285,5125) ; v1(6975,1145) 6975,1675 6940,1710 6940,2218.9 ; v1(7125,4910) 6940,4725 6940,3918.9 ; U14.1@7175,2218.9 6940,2218.9 ; U1.1@7175,3918.9 6940,3918.9 ; v1(7300,5800) R19.2@7300,5863 ; v1(8625,1150) U22.1@8625,1218.9 ; v1(9325,1150) U23.1@9325,1218.9 ; v1(9965,1220) U24.1@10023.9,1220 ; 6940,2218.9 6940,3918.9
  Bottom Layer w10: v1(4625,1150) 5325,1150 6025,1150 6975,1150 v1(8625,1150) v1(9325,1150) 9895,1150 v1(9965,1220) ; v1(7125,4910) 7200,4910 7285,4995 v1(7285,5125) ; v1(7125,5175) 7185,5235 7185,5415 7300,5530 v1(7300,5800)
"LIGHT_SENSOR NEG": J19.4 R233.2 R234.2 | length 324
  Top Layer w10: J19.4@10150,879 R233.2@10150,705 R234.2@10300,705
"LIGHT_SENSOR POS": J19.6 R232.2 | length 138
  Top Layer w10: R232.2@9662,879 J19.6@9800,879
MCLK: R32.1 U3.50 U4.4 | length 5705.2
  Top Layer w10: U3.50@7185.16,5040.16 7185.16,4939.84 7223,4902 v1(7313,4902) R32.1@7313,4850 ; v1(8110,4902) 8110,1055 8220,945 8755,945 8780.32,919.68 U4.4@8780.32,880.71
  Bottom Layer w10: v1(7313,4902) v1(8110,4902)
MCLR: J13.1 R3.1 U3.9 | length 2338.1
  Top Layer w10: R3.1@7052,6510 7052,6702 J13.1@7120,6770 ; v1(7224.53,5500.47) U3.9@7224.53,5559.84
  Bottom Layer w10: J13.1@7120,6770 7120,6660 7080,6620 6875,6620 6740,6485 6740,5790 6780,5750 7194.53,5750 7224.53,5720 v1(7224.53,5500.47)
MEM0: R4.1 U2.7 U3.13 | length 3368.5
  Top Layer w10: U2.7@4419.88,4975 v1(4531,4975) 4563,4943 R4.1@4563,4835 ; U3.13@7145.79,5559.84 7145.79,5519.21 v1(7155,5510)
  Bottom Layer w10: v1(4531,4975) 4646,5090 7004.72,5090 7060,5145.28 7060,5495 7075,5510 v1(7155,5510)
MEM1: R16.1 U3.14 U6.7 | length 2823.6
  Top Layer w10: U6.7@4919.88,4975 v1(5031,4975) 5063,4943 R16.1@5063,4835 ; v1(7090,5475) 7126.1,5511.1 U3.14@7126.1,5559.84
  Bottom Layer w10: v1(5031,4975) 5126,5070 7015,5070 7090,5145 v1(7090,5475)
MEM2: R31.1 U3.52 U9.7 | length 2098.9
  Top Layer w10: U9.7@5419.88,4975 v1(5530,4975) 5563,4942 R31.1@5563,4835 ; U3.52@7224.53,5040.16 7224.53,5089.53 v1(7240,5105)
  Bottom Layer w10: v1(5530,4975) 5555,5000 7135,5000 v1(7240,5105)
MEM3: R58.1 U3.53 U13.7 | length 1529
  Top Layer w10: U13.7@5919.88,4975 v1(6030,4975) 6063,4942 R58.1@6063,4835 ; v1(7220,4975) 7244.21,4999.21 U3.53@7244.21,5040.16
  Bottom Layer w10: v1(6030,4975) v1(7220,4975)
MEM_SCK: U2.16 U3.45 U6.16 U9.16 U13.16 | length 2896.6
  Top Layer w10: U2.16@4780.12,5275 v1(4780.12,5309.76) ; U6.16@5280.12,5275 v1(5280.12,5309.76) ; U9.16@5780.12,5275 v1(5780.12,5309.76) ; U13.16@6280.12,5275 v1(6280.12,5309.88) ; v1(6605,5310) 6605,5000 6685,4920 7065.47,4920 7086.73,4941.26 U3.45@7086.73,5040.16
  Bottom Layer w10: v1@4780.12,5309.88 5280.12,5309.88 5780.12,5309.88 v1(6280.12,5309.88) v1@6605,5309.88
MEM_SDI: U2.8 U3.44 U6.8 U9.8 U13.8 | length 3015
  Top Layer w10: U2.8@4419.88,4925 4475,4925 v1(4500,4950) ; U6.8@4919.88,4925 4975,4925 v1(5000,4950) ; U9.8@5419.88,4925 5475,4925 v1(5500,4950) ; U13.8@5919.88,4925 5975,4925 v1(6000,4950) ; v1(7060,4950) 7067.05,4957.05 U3.44@7067.05,5040.16
  Bottom Layer w10: v1(4500,4950) v1(5000,4950) v1(5500,4950) v1(6000,4950) v1(7060,4950)
MEM_SDO: U2.15 U3.43 U6.15 U9.15 U13.15 | length 2772.4
  Top Layer w10: v1(4700,5225) U2.15@4780.12,5225 ; v1(5200,5225) U6.15@5280.12,5225 ; v1(5700,5225) U9.15@5780.12,5225 ; v1(6200,5225) U13.15@6280.12,5225 ; v1(7002.68,5132.68) 7047.36,5087.99 U3.43@7047.36,5040.16
  Bottom Layer w10: v1(4700,5225) v1(5200,5225) v1(5700,5225) v1(6200,5225) 6292.32,5132.68 v1(7002.68,5132.68)
MEM_W\: R1.2 U2.9 U3.36 U6.9 U9.9 U13.9 | length 2839.1
  Top Layer w10: v1(4700,4925) U2.9@4780.12,4925 ; v1(5200,4925) U6.9@5280.12,4925 ; v1(5700,4925) U9.9@5780.12,4925 ; v1(6200,4925) U13.9@6280.12,4925 ; R1.2@6302,4835 6302,4873 6280.12,4894.88 U13.9@6280.12,4925 ; v1(6360,5200) 6345,5185 6345,4935 6335,4925 U13.9@6280.12,4925 ; v1(6871.73,5201.73) 6881.73,5191.73 U3.36@6935.16,5191.73
  Bottom Layer w10: v1(4700,4925) v1(5200,4925) v1(5700,4925) v1(6200,4925) ; v1@6360,5199.89 v1(6871.73,5201.73)
NetC5_1: C5.1 C7.1 U4.5 | length 403.7
  Top Layer w10: C5.1@8370,837 8403,870 C7.1@8580,870 U4.5@8760,870
NetC12_1: C12.1 U4.6 | length 535.3
  Top Layer w10: C12.1@8365,550 8365,620 8385,640 8730,640 8760.63,670.63 U4.6@8760.63,719.29
NetC13_1: C13.1 U4.10 | length 184.3
  Top Layer w10: C13.1@8840,535 U4.10@8840,719.29
NetC13_2: C13.2 R28.2 R30.1 | length 329.4
  Top Layer w10: R28.2@8840,317 C13.2@8840,425 8875,425 8987,537 R30.1@9015,537
NetC15_1: C15.1 U7.3 | length 133.6
  Top Layer w10: C15.1@9922,5250 9950,5278 U7.3@9950,5372
NetC15_2: C15.2 D2.2 L1.1 U7.1 | length 313
  Top Layer w40: 9735,5450 9850,5450 U7.1@9850,5372 C15.2@9850,5252
NetC19_1: C19.1 C21.1 R30.2 | length 1284.4
  Top Layer w10: C21.1@8100,185 9065,185 9090,210 9090,280 C19.1@9015,355 R30.2@9015,463
NetC21_2: C21.2 R53.1 | length 98
  Top Layer w10: C21.2@8100,295 R53.1@8100,393
NetC22_1: C22.1 R32.2 Y1.2 | length 253.3
  Top Layer w10: R32.2@7387,4850 C22.1@7387,4750 7387,4678 7395,4670 Y1.2@7395,4600
NetC26_1: C26.1 U3.49 Y1.1 | length 465.2
  Top Layer w10: Y1.1@7105,4600 7105,4670 7113,4678 C26.1@7113,4750 7113,4798 7165.47,4850.47 U3.49@7165.47,5040.16
NetC27_1: C27.1 U11.2 U11.3 | length 259.4
  Top Layer w10: U11.2@7875,494.68 7875,425 7925,425 ; C27.1@7925,355 7925,425 ; U11.3@7925,494.68 7925,425
NetC34_1: C34.1 U15.2 | length 790.9
  Top Layer w10: C34.1@4500,5613 4500,5520 4480,5500 4360,5500 4335,5525 4335,5750 4355,5770 4500,5770 4536.02,5806.02 U15.2@4536.02,5871.06
NetC34_2: C34.2 U15.4 | length 220.2
  Top Layer w10: C34.2@4500,5687 4500,5710 4587.2,5797.2 U15.4@4587.2,5871.06
NetC35_1: C35.1 U15.5 | length 323.5
  Top Layer w10: C35.1@4600,5613 4568,5613 4550,5631 4550,5730 4612.79,5792.79 U15.5@4612.79,5871.06
NetC35_2: C35.2 U15.6 | length 200
  Top Layer w10: C35.2@4600,5687 4600,5750 4638.39,5788.39 U15.6@4638.39,5871.06
NetC38_1: C38.1 U15.3 | length 301.5
  Top Layer w10: C38.1@4400,5687 4400,5725 4425,5750 4511.25,5750 4561.61,5800.36 U15.3@4561.61,5871.06
NetC40_1: C40.1 U15.7 | length 199
  Top Layer w10: U15.7@4663.98,5871.06 4663.98,5786.02 4700,5750 C40.1@4700,5687
NetC41_2: C41.2 R75.3 U17.5 | length 782.7
  Top Layer w20: R75.3@10100,6550 10140,6550 10260,6430 C41.2@10400,6430 10495,6430 10590,6525 10705,6525 10725,6545 U17.5@10725,6605.31
NetC44_1: C44.1 U17.2 | length 124.7
  Top Layer w20: C44.1@10625,6270 U17.2@10625,6394.69
NetC44_2: C44.2 U17.4 | length 338.3
  Top Layer w20: C44.2@10625,6130 10680,6130 10725,6175 U17.4@10725,6394.69
NetD12_3: D12.3 J14.1 U16.8 | length 1022
  Top Layer w10: U16.8@6135.55,6135.94 v1(6135.55,6100) 6135.55,6014.45 6150,6000 D12.3@6150,5896.26
  Bottom Layer w10: J14.1@5644.21,6672.83 5715,6602.05 5715,6520.55 v1(6135.55,6100)
NetD13_3: D13.3 J14.2 U16.5 | length 1429.2
  Top Layer w10: J14.2@5545.79,6672.83 5475,6602.05 5475,6490 5800,6165 5800,5870 5820,5850 5953.74,5850 D13.3@6000,5896.26 6000,5930 6064.69,5994.69 U16.5@6064.69,6104.45
NetD14_3: D14.3 J14.3 U16.4 | length 1067.3
  Top Layer w10: J14.3@5545.79,6546.85 5850,6242.64 5850,6000 ; D14.3@5850,5896.26 5850,6000 ; U16.4@6045,6104.45 6045,6015 6030,6000 5850,6000
NetDS1_2: DS1.2 DS2.1 | length 145
  Bottom Layer w20: DS1.2@2498.9,4585.8 DS2.1@2643.9,4585.8
NetDS2_2: DS2.2 R111.2 | length 289.2
  Top Layer w20: R111.2@2615,4350 2615,4456.9 DS2.2@2743.9,4585.8
NetDS3_2: DS3.2 DS4.1 | length 145
  Bottom Layer w20: DS3.2@4123.9,4585.8 DS4.1@4268.9,4585.8
NetDS4_2: DS4.2 R112.2 | length 289.2
  Top Layer w20: R112.2@4240,4350 4240,4456.9 DS4.2@4368.9,4585.8
NetDS5_2: DS5.2 DS6.1 | length 145
  Bottom Layer w20: DS5.2@5748.9,4585.8 DS6.1@5893.9,4585.8
NetDS6_2: DS6.2 R113.2 | length 289.2
  Top Layer w20: R113.2@5865,4350 5865,4456.9 DS6.2@5993.9,4585.8
NetDS7_2: DS7.2 DS8.1 | length 145
  Bottom Layer w20: DS7.2@8998.9,4585.8 DS8.1@9143.9,4585.8
NetDS8_2: DS8.2 R114.2 | length 289.2
  Top Layer w20: R114.2@9115,4350 9115,4456.9 DS8.2@9243.9,4585.8
NetDS9_2: DS9.2 DS10.1 | length 145
  Bottom Layer w20: DS9.2@10623.9,4585.8 DS10.1@10768.9,4585.8
NetDS10_2: DS10.2 R115.2 | length 289.2
  Top Layer w20: R115.2@10740,4350 10740,4456.9 DS10.2@10868.9,4585.8
NetDS11_2: DS11.2 DS12.1 | length 145
  Bottom Layer w20: DS11.2@12248.9,4585.8 DS12.1@12393.9,4585.8
NetDS12_2: DS12.2 R116.2 | length 289.2
  Top Layer w20: R116.2@12365,4350 12365,4456.9 DS12.2@12493.9,4585.8
NetDS13_2: DS13.2 DS14.1 | length 145
  Bottom Layer w20: DS13.2@2988.9,4585.8 DS14.1@3133.9,4585.8
NetDS14_2: DS14.2 R117.2 | length 376.6
  Top Layer w20: R117.2@2955,4350 2998.1,4350 DS14.2@3233.9,4585.8
NetDS15_2: DS15.2 DS16.1 | length 145
  Bottom Layer w20: DS15.2@4613.9,4585.8 DS16.1@4758.9,4585.8
NetDS16_2: DS16.2 R118.2 | length 376.6
  Top Layer w20: R118.2@4580,4350 4623.1,4350 DS16.2@4858.9,4585.8
NetDS17_2: DS17.2 DS18.1 | length 145
  Bottom Layer w20: DS17.2@6238.9,4585.8 DS18.1@6383.9,4585.8
NetDS18_2: DS18.2 R119.2 | length 376.6
  Top Layer w20: R119.2@6205,4350 6248.1,4350 DS18.2@6483.9,4585.8
NetDS19_2: DS19.2 DS20.1 | length 145
  Bottom Layer w20: DS19.2@9488.9,4585.8 DS20.1@9633.9,4585.8
NetDS20_2: DS20.2 R120.2 | length 376.6
  Top Layer w20: R120.2@9455,4350 9498.1,4350 DS20.2@9733.9,4585.8
NetDS21_2: DS21.2 DS22.1 | length 145
  Bottom Layer w20: DS21.2@11113.9,4585.8 DS22.1@11258.9,4585.8
NetDS22_2: DS22.2 R121.2 | length 376.6
  Top Layer w20: R121.2@11080,4350 11123.1,4350 DS22.2@11358.9,4585.8
NetDS23_2: DS23.2 DS24.1 | length 145
  Bottom Layer w20: DS23.2@12738.9,4585.8 DS24.1@12883.9,4585.8
NetDS24_2: DS24.2 R122.2 | length 376.6
  Top Layer w20: R122.2@12705,4350 12748.1,4350 DS24.2@12983.9,4585.8
NetDS25_2: DS25.2 DS26.1 | length 300.3
  Bottom Layer w20: DS26.1@3240.5,4131.6 3240.5,4175.5 3383,4318 DS25.2@3383,4372.9
NetDS26_2: DS26.2 R129.2 | length 270.9
  Top Layer w20: R129.2@3100,4205 3267.1,4205 DS26.2@3340.5,4131.6
NetDS27_2: DS27.2 DS28.1 | length 300.3
  Bottom Layer w20: DS28.1@4865.5,4131.6 4865.5,4190.5 5008,4333 DS27.2@5008,4372.9
NetDS28_2: DS28.2 R130.2 | length 270.9
  Top Layer w20: R130.2@4725,4205 4892.1,4205 DS28.2@4965.5,4131.6
NetDS29_2: DS29.2 DS30.1 | length 300.3
  Bottom Layer w20: DS30.1@6490.5,4131.6 6490.5,4185.5 6633,4328 DS29.2@6633,4372.9
NetDS30_2: DS30.2 R131.2 | length 270.9
  Top Layer w20: R131.2@6350,4205 6517.1,4205 DS30.2@6590.5,4131.6
NetDS31_2: DS31.2 DS32.1 | length 300.3
  Bottom Layer w20: DS32.1@9740.5,4131.6 9740.5,4175.5 9883,4318 DS31.2@9883,4372.9
NetDS32_2: DS32.2 R132.2 | length 270.9
  Top Layer w20: R132.2@9600,4205 9767.1,4205 DS32.2@9840.5,4131.6
NetDS33_2: DS33.2 DS34.1 | length 300.3
  Bottom Layer w20: DS34.1@11365.5,4131.6 11365.5,4180.5 11508,4323 DS33.2@11508,4372.9
NetDS34_2: DS34.2 R133.2 | length 270.9
  Top Layer w20: R133.2@11225,4205 11392.1,4205 DS34.2@11465.5,4131.6
NetDS35_2: DS35.2 DS36.1 | length 300.3
  Bottom Layer w20: DS36.1@12990.5,4131.6 12990.5,4175.5 13133,4318 DS35.2@13133,4372.9
NetDS36_2: DS36.2 R134.2 | length 270.9
  Top Layer w20: R134.2@12850,4205 13017.1,4205 DS36.2@13090.5,4131.6
NetDS37_2: DS37.2 DS38.1 | length 300.2
  Bottom Layer w20: DS38.1@3155.4,3649.1 3155.4,3700.4 3297.9,3842.9 DS37.2@3297.9,3890.3
NetDS38_2: DS38.2 R135.2 | length 265.8
  Top Layer w20: R135.2@3050,3795 3109.5,3795 DS38.2@3255.4,3649.1
NetDS39_2: DS39.2 DS40.1 | length 300.2
  Bottom Layer w20: DS40.1@4780.4,3649.1 4780.4,3695.4 4922.9,3837.9 DS39.2@4922.9,3890.3
NetDS40_2: DS40.2 R136.2 | length 265.8
  Top Layer w20: R136.2@4675,3795 4734.5,3795 DS40.2@4880.4,3649.1
NetDS41_2: DS41.2 DS42.1 | length 300.2
  Bottom Layer w20: DS42.1@6405.4,3649.1 6405.4,3700.4 6547.9,3842.9 DS41.2@6547.9,3890.3
NetDS42_2: DS42.2 R137.2 | length 265.8
  Top Layer w20: R137.2@6300,3795 6359.5,3795 DS42.2@6505.4,3649.1
NetDS43_2: DS43.2 DS44.1 | length 300.2
  Bottom Layer w20: DS44.1@9655.4,3649.1 9655.4,3690.4 9797.9,3832.9 DS43.2@9797.9,3890.3
NetDS44_2: DS44.2 R138.2 | length 265.8
  Top Layer w20: R138.2@9550,3795 9609.5,3795 DS44.2@9755.4,3649.1
NetDS45_2: DS45.2 DS46.1 | length 300.2
  Bottom Layer w20: DS46.1@11280.4,3649.1 11280.4,3695.4 11422.9,3837.9 DS45.2@11422.9,3890.3
NetDS46_2: DS46.2 R139.2 | length 265.8
  Top Layer w20: R139.2@11175,3795 11234.5,3795 DS46.2@11380.4,3649.1
NetDS47_2: DS47.2 DS48.1 | length 300.2
  Bottom Layer w20: DS48.1@12905.4,3649.1 12905.4,3700.4 13047.9,3842.9 DS47.2@13047.9,3890.3
NetDS48_2: DS48.2 R140.2 | length 265.8
  Top Layer w20: R140.2@12800,3795 12859.5,3795 DS48.2@13005.4,3649.1
NetDS49_2: DS49.2 DS50.1 | length 300.3
  Bottom Layer w20: DS50.1@3049,3045.9 3049,3094 3191.6,3236.6 DS49.2@3191.6,3287.1
NetDS50_2: DS50.2 R147.2 | length 275.6
  Top Layer w20: R147.2@2900,3110 3084.9,3110 DS50.2@3149,3045.9